# Altium PCB HotBed-24V.PcbDoc (part 1 of 3)
Units mil, origin at the board's own origin, x right, y up, seen from the top; angles counter-clockwise.
Board outline 5171.49 x 4724.57 mil, 2 copper layers (Top Layer, Bottom Layer); 4 components, 1 nets, 12 pads, 0 vias.
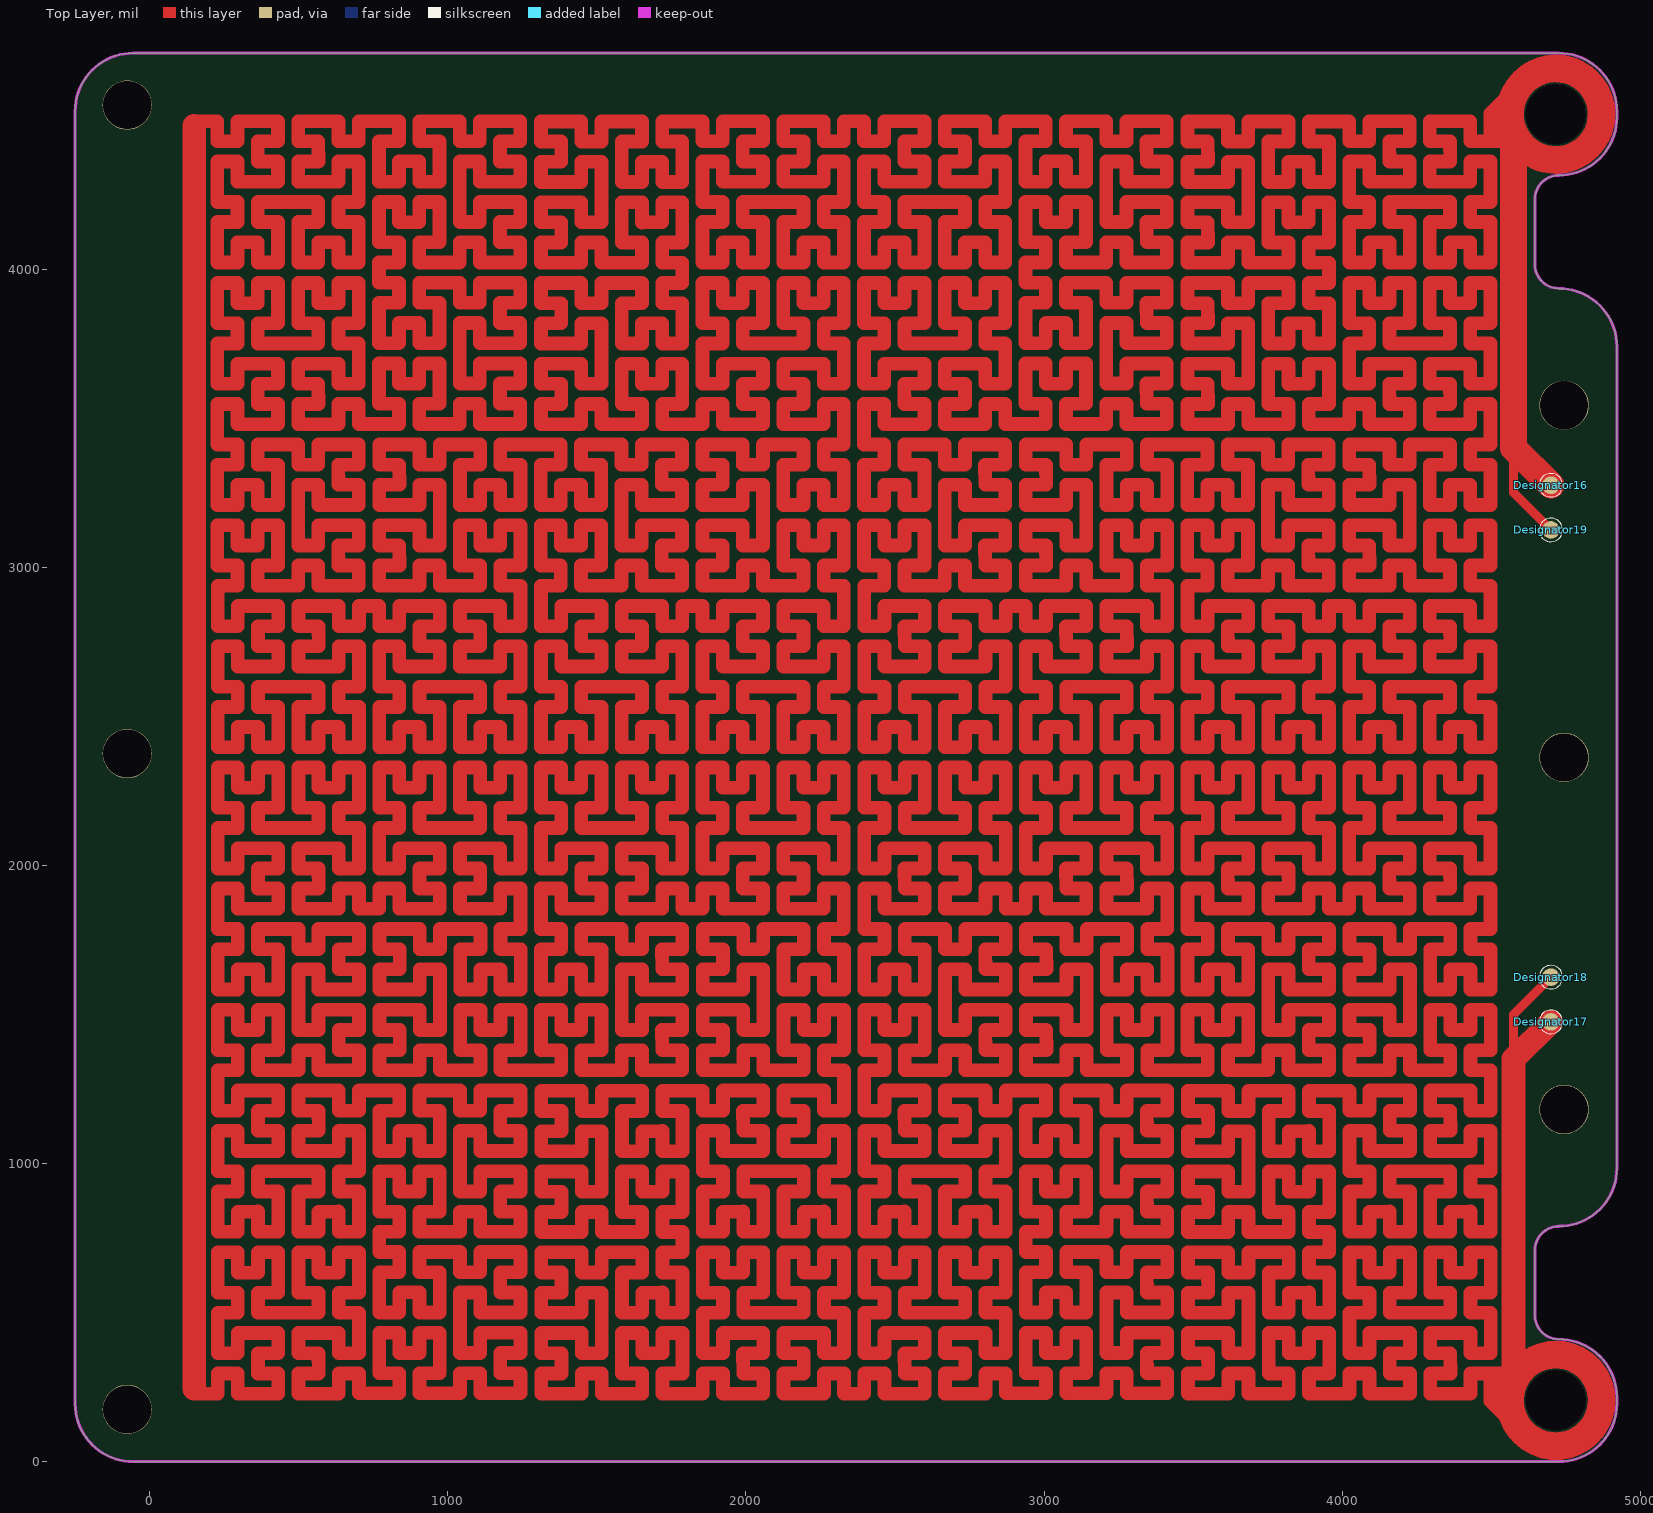
[diagram p0: Top Layer view]
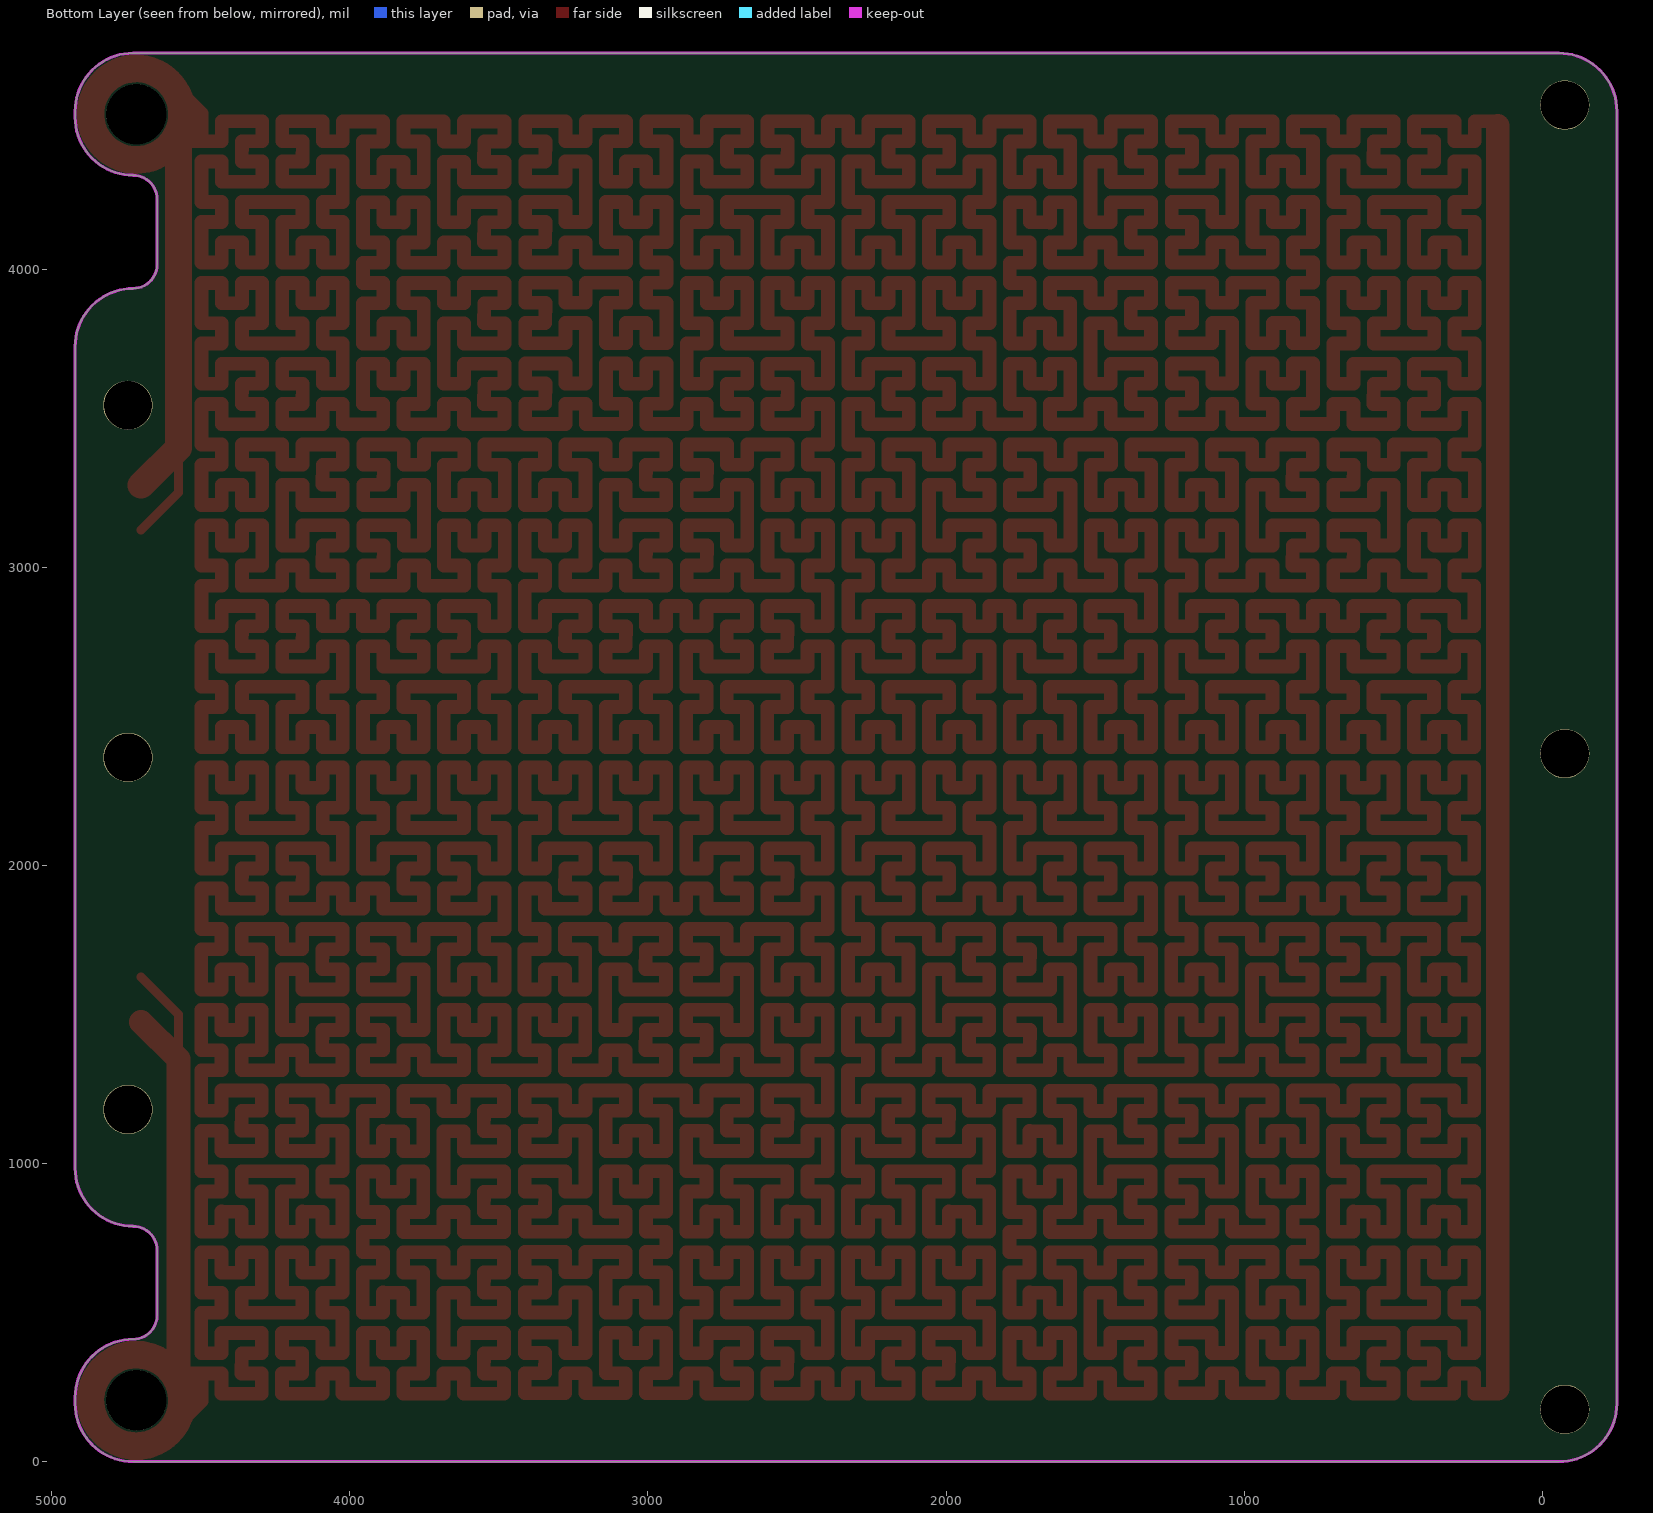
[diagram p1: Bottom Layer view, seen from below]

## Layer stack, top to bottom
Top Solder: solder mask 0.4, Solder Resist, Dk 3.5
Top Layer: signal copper 1.4
Dielectric 1: dielectric 12.6, FR-4, Dk 4.8
Bottom Layer: signal copper 1.4
Bottom Solder: solder mask 0.4, Solder Resist, Dk 3.5

## Board outline
-250,194.41 ccw(c-55.51,194.41) -55.51,-0.08 -55.51,0 4726.85,0 ccw(c4726.85,194.49) 4921.34,194.49 4921.06,194.77 4921.06,216.06 ccw(c4726.57,216.06) 4726.57,410.55 cw(c4726.57,490.47) 4646.65,490.47 4646.5,490.62 4646.5,709.19 cw(c4726.42,709.19) 4726.42,789.11 4726.92,789.61 ccw(c4726.92,984.1) 4921.41,984.1 4921.26,984.25 4921.26,3740.16 4921.41,3740.31 ccw(c4726.92,3740.31) 4726.92,3934.8 4726.42,3935.3 cw(c4726.42,4015.22) 4646.5,4015.22 4646.5,4234.5 cw(c4726.42,4234.5) 4726.42,4314.42 4726.92,4314.92 ccw(c4726.92,4509.41) 4921.41,4509.41 4921.26,4509.56 4921.26,4530 ccw(c4726.77,4530) 4726.77,4724.49 4726.77,4724.41 -55.59,4724.41 ccw(c-55.59,4529.92) -250.08,4529.92 -250,4530

## Design rules (kind name [scope] priority, off if disabled: settings)
Clearance [All] p1: gap=0 ignorepadtopadclearanceinfootprint=TRUE
PolygonConnect [All] p1: connectstyle=Relief reliefconductorwidth=10 reliefentries=4 polygonreliefangle="90 Angle" airgapwidth=10
RoutingVias [All] p1: holewidth=28 width=50 viastyle="Through Hole" minholewidth=28 minwidth=50 maxholewidth=28 maxwidth=50
SolderMaskExpansion [All] p1: expansion=4
Width [All] p1: maxlimit=196.85 minlimit=10 preferedwidth=53.94 minimp=50.000000 maximp=50.000000 favimp=50.000000
30 further rules are at their usual default settings.

## Components (designator, comment, footprint, x,y, rotation, side; value= is the part's Value field where it differs from the comment)
Designator16 "Comment" TP-1R5-SM 4700,3275 r0 top
Designator17 "Comment" TP-1R5-SM 4700,1475 r0 top
Designator18 "Comment" TP-1R5-SM 4700,1625 r0 top
Designator19 "Comment" TP-1R5-SM 4700,3125 r0 top

## Footprints (in the part's own frame and the unit in brackets; to place one, negate y for a bottom-side part, rotate by r counter-clockwise, add the part's x,y. Pads: shape width x height; smd on the part's side, far side on the other; paste and mask are expansions set on the pad)
TP-1R5-SM [mm]
  round 1.5 smd: 1(0,0)
  silkscreen extent -1,-1 1,1, body extent -1,-1 1,1, height 0.8

## Part data
Designator16 Designator17 Designator18 Designator19: library part 1R5

## Free pads (board coordinates)
  round 164.96 hole 161.42: ""(-75,175) ""(-75,2375) ""(-75,4550) ""(4744.09,1181.1) ""(4744.09,2362.2) ""(4744.09,3543.31)
  round 200.79 hole 202.76: ""(4716.34,4519.49) ""(4716.49,205.48)

## Nets (pads, with @x,y where several pads share a name; then routed paths per layer and width w, separated by ;. In a path a pad name is that pad's centre, name@x,y a point inside that pad or via, vN(x,y) a via of type N, cw(c..) or ccw(c..) an arc to the next point about the centre after c; other vN are vias at no path point)
Bed: Designator17.1 Designator18.1 Designator19.1 | length 287451.6
  Top Layer w30: 4575,1350 4575,1500 Designator18.1@4700,1625 ; 4575,3400 4575,3250 Designator19.1@4700,3125